# EAGLE board DP6037_PTH.v1 (EAGLE 5.07)
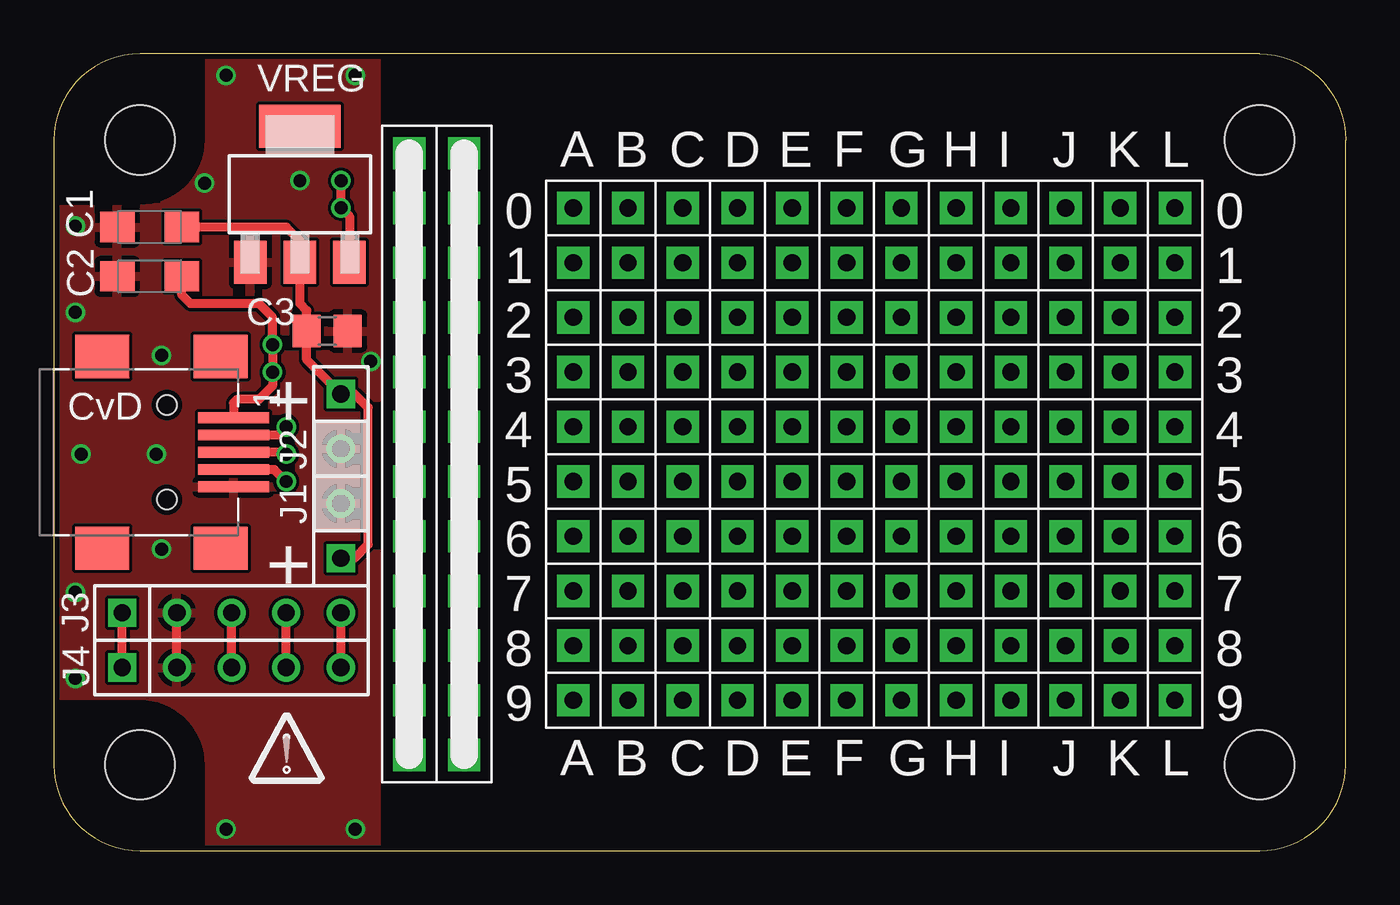
[diagram p0: board, top side]
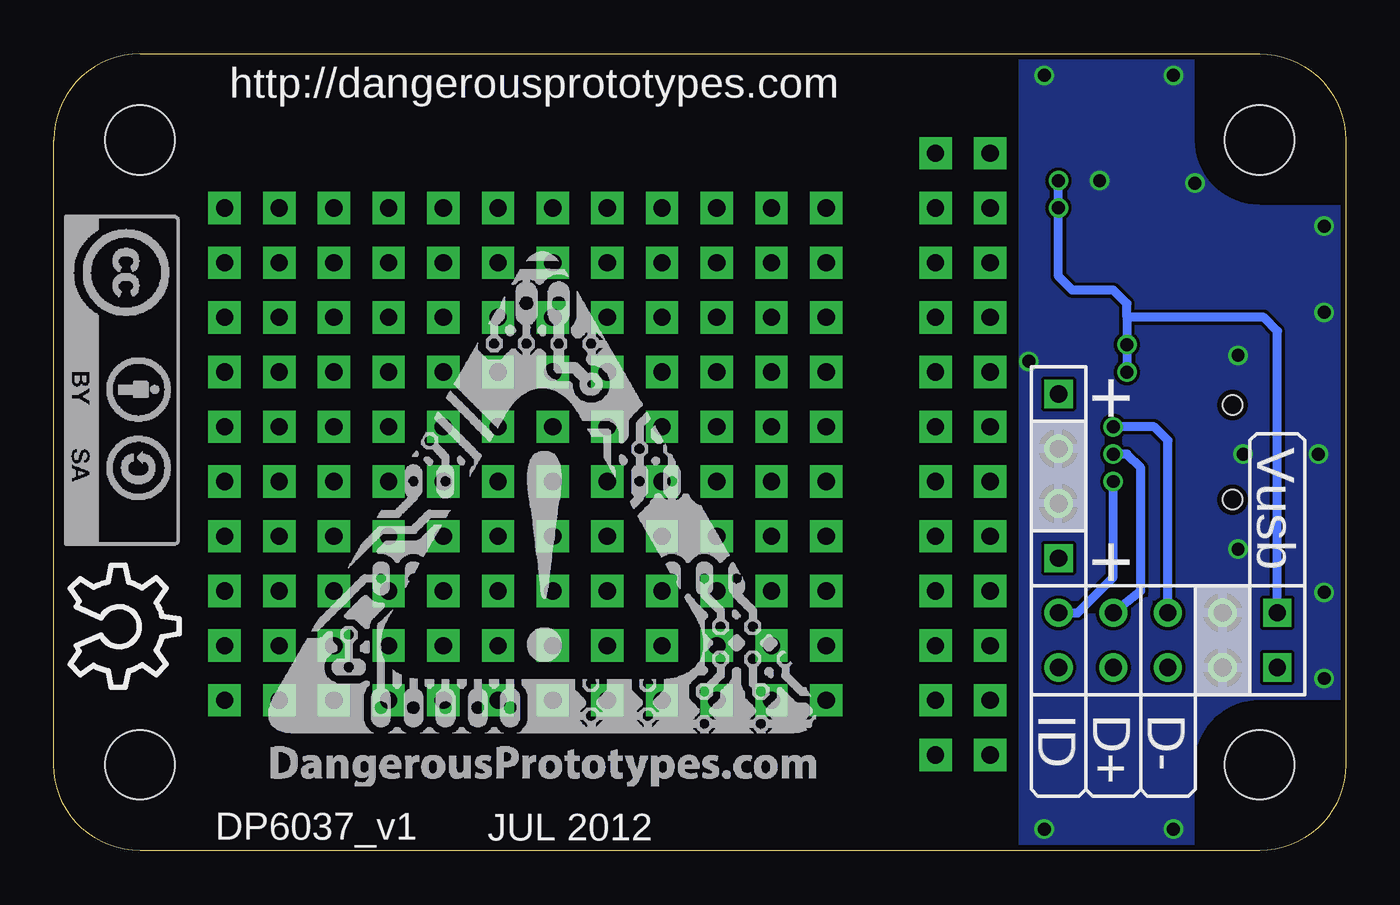
[diagram p1: board, bottom side, seen from below]

Size 60 x 37 mm. Coordinates in mm from the lower left corner, seen from the top.
Copper layers (1*16): Top 0.035mm / dielectric 1.5mm / Bottom 0.035mm
Design rules "Fusion_eagle_rule_v1.1": minimum track width 6mil, minimum drill 12mil, track to track 6mil, track to pad 6mil, pad to pad 6mil, via to via 6mil, smd to smd 0mil, copper to edge 10mil, drill to drill 10mil, minimum pad ring 10mil, minimum via ring 6mil, stop-mask expansion 2mil, vias tented up to drill 100mil, thermal gap 10mil

## Footprints (pad centres in the part's own frame; a part is rotated, then mirrored left to right if it is on the bottom)
SMC_A = smd 1.6 x 1.4: + -1.5,0; - 1.5,0
C805 = smd 1.3 x 1.5: 1 -0.95,0; 2 0.95,0
M1X2 = drill 0.8 square: 1 -1.27,0 | drill 0.8 round: 2 1.27,0
M1X5 = drill 0.8 square: 1 -5.08,0 | drill 0.8 round: 2 -2.54,0; 3 0,0; 4 2.54,0; 5 5.08,0
DP6037_V1 = hole 3.2: 4,4; 56,4; 56,33; 4,33
PROTO_10_12 = drill 0.8 pad 1.5 square: 1 -13.97,-11.43; 2 -11.43,-11.43; 3 -8.89,-11.43; 4 -6.35,-11.43; 5 -3.81,-11.43; 6 -1.27,-11.43; 7 1.27,-11.43; 8 3.81,-11.43; 9 6.35,-11.43; 10 8.89,-11.43; 11 11.43,-11.43; 12 13.97,-11.43; 13 -13.97,-8.89; 14 -11.43,-8.89; 15 -8.89,-8.89; 16 -6.35,-8.89; 17 -3.81,-8.89; 18 -1.27,-8.89; 19 1.27,-8.89; 20 3.81,-8.89; 21 6.35,-8.89; 22 8.89,-8.89; 23 11.43,-8.89; 24 13.97,-8.89; 25 -13.97,-6.35; 26 -11.43,-6.35; 27 -8.89,-6.35; 28 -6.35,-6.35; 29 -3.81,-6.35; 30 -1.27,-6.35; 31 1.27,-6.35; 32 3.81,-6.35; 33 6.35,-6.35; 34 8.89,-6.35; 35 11.43,-6.35; 36 13.97,-6.35; 37 -13.97,-3.81; 38 -11.43,-3.81; 39 -8.89,-3.81; 40 -6.35,-3.81; 41 -3.81,-3.81; 42 -1.27,-3.81; 43 1.27,-3.81; 44 3.81,-3.81; 45 6.35,-3.81; 46 8.89,-3.81; 47 11.43,-3.81; 48 13.97,-3.81; 49 -13.97,-1.27; 50 -11.43,-1.27; 51 -8.89,-1.27; 52 -6.35,-1.27; 53 -3.81,-1.27; 54 -1.27,-1.27; 55 1.27,-1.27; 56 3.81,-1.27; 57 6.35,-1.27; 58 8.89,-1.27; 59 11.43,-1.27; 60 13.97,-1.27; 61 -13.97,1.27; 62 -11.43,1.27; 63 -8.89,1.27; 64 -6.35,1.27; 65 -3.81,1.27; 66 -1.27,1.27; 67 1.27,1.27; 68 3.81,1.27; 69 6.35,1.27; 70 8.89,1.27; 71 11.43,1.27; 72 13.97,1.27; 73 -13.97,3.81; 74 -11.43,3.81; 75 -8.89,3.81; 76 -6.35,3.81; 77 -3.81,3.81; 78 -1.27,3.81; 79 1.27,3.81; 80 3.81,3.81; 81 6.35,3.81; 82 8.89,3.81; 83 11.43,3.81; 84 13.97,3.81; 85 -13.97,6.35; 86 -11.43,6.35; 87 -8.89,6.35; 88 -6.35,6.35; 89 -3.81,6.35; 90 -1.27,6.35; 91 1.27,6.35; 92 3.81,6.35; 93 6.35,6.35; 94 8.89,6.35; 95 11.43,6.35; 96 13.97,6.35; 97 -13.97,8.89; 98 -11.43,8.89; 99 -8.89,8.89; 100 -6.35,8.89; 101 -3.81,8.89; 102 -1.27,8.89; 103 1.27,8.89; 104 3.81,8.89; 105 6.35,8.89; 106 8.89,8.89; 107 11.43,8.89; 108 13.97,8.89; 109 -13.97,11.43; 110 -11.43,11.43; 111 -8.89,11.43; 112 -6.35,11.43; 113 -3.81,11.43; 114 -1.27,11.43; 115 1.27,11.43; 116 3.81,11.43; 117 6.35,11.43; 118 8.89,11.43; 119 11.43,11.43; 120 13.97,11.43
SUPPL_12 = drill 0.8 pad 1.5 square: G40 -13.97,1.27; G41 -11.43,1.27; G42 -8.89,1.27; G43 -6.35,1.27; G44 -3.81,1.27; G45 -1.27,1.27; G46 1.27,1.27; G47 3.81,1.27; G48 6.35,1.27; G49 8.89,1.27; G410 11.43,1.27; G411 13.97,1.27; V40 -13.97,-1.27; V41 -11.43,-1.27; V42 -8.89,-1.27; V43 -6.35,-1.27; V44 -3.81,-1.27; V45 -1.27,-1.27; V46 1.27,-1.27; V47 3.81,-1.27; V48 6.35,-1.27; V49 8.89,-1.27; V410 11.43,-1.27; V411 13.97,-1.27
CONN_USB_MINI-B = smd 2 x 2.5: BODY@1 -4.45,2.5; BODY@2 4.45,2.5; BODY@3 4.45,-3; BODY@4 -4.45,-3 | smd 0.5 x 3.3: D+ 0,3.1; D- -0.8,3.1; GND 1.6,3.1; ID 0.8,3.1; VUSB -1.6,3.1 | hole 0.9: -2.2,0; 2.2,0
SOT-223 = smd 1.5 x 2: 1 -2.3,-3.15; 2 0,-3.15; 3 2.3,-3.15 | smd 3.8 x 2: 4 0,3.15

## Placement (x,y rotation side)
C1  [SMC_A]  4.45,28.96 180 top
C2  [SMC_A]  4.45,26.67 180 top
C3  [C805]  12.7,24.13 0 top
J1  CON_HEADER_1X02-PTH  [M1X2]  13.34,14.86 90 top
J2  CON_HEADER_1X02-PTH  [M1X2]  13.34,19.93 270 top
J3  CON_HEADER_1X05-PTH  [M1X5]  8.26,11.04 0 top
J4  CON_HEADER_1X05-PTH  [M1X5]  8.26,8.51 0 top
PCB1  PCB_DP_RECTANGLE-3.7X6  [DP6037_V1]  0,0 0 top
U$1  FRAME_DINA4_L  [DP_LOGO]  10.81,3.76 0 top
U$3  PROTO_10X12NOSUPPLY  [PROTO_10_12]  38.1,18.41 0 top
U$4  SUPPLY_12  [SUPPL_12]  17.78,18.41 90 top
U$5  [OSHW_10X200_NOTEXT]  59.25,13.25 270 bottom
U$6  [CC-BY-SA]  59.5,29.5 270 bottom
U$7  [DP_LOGO_ART_1X1]  50,3 0 bottom
USB1  CON-USB-F-MINI-B  [CONN_USB_MINI-B]  5.25,18.5 270 top
VREG  [SOT-223]  11.43,30.48 0 top

## Library data of the parts
C1-C3 J1-J4 PCB1 U$6 U$7 USB1 VREG = dp_devices
U$1 = dp_devices; LICENSE: CC-BY-SA; URL1: http://; URL2: DangerousPrototypes.com
U$3 U$4 = DP_protoboard
U$5 = ohw-logo

## Nets
N$2: C1.+ C3.1 J1.1 J2.1 VREG.2
N$3: C1.- C2.- C3.2 J1.2 J2.2 J3.2 J4.2 USB1.GND VREG.1
N$4: C2.+ J3.1 J4.1 USB1.VUSB VREG.3
N$11: J3.3 J4.3 USB1.D-
N$14: J3.4 J4.4 USB1.D+
N$16: J3.5 J4.5 USB1.ID

## Tracks (layer width: path | path; a pad name or v marks a point on that pad's centre or on a via)
N$2
  Top 0.406: J1.1 13.97,13.59 14.61,14.22 14.61,20.57 13.97,21.2 J2.1 11.75,22.79 C3.1 11.75,25.08 11.43,25.4 VREG.2 11.43,28.32 10.79,28.96 C1.+
N$3  (via drill 0.6)
  Top 0.406: J4.2 J3.2
  other vias: 14,1 8,1 1,8 1,12 5,14 5,23 1.27,18.41 1,25 1,29 14,36 8,36 7,31 11.43,31.11 14.72,22.73 4.76,18.41
  pour Top: 15,37 0,37 0,0 15,0
  pour Bottom: 15,0 0,0 0,37 15,37
N$4  (via drill 0.6)
  Top 0.406: J4.1 J3.1 | USB1.VUSB 8.35,20.8 8.51,20.95 9.53,20.95 10.16,21.59 v10.16,22.23 v10.16,23.5 10.16,24.77 9.53,25.4 6.35,25.4 5.95,25.8 C2.+ | v13.34,31.11 v13.34,29.84 13.73,29.45 VREG.3
  Bottom 0.406: v10.16,22.23 v10.16,23.5 10.16,24.77 | 10.16,24.77 10.16,25.4 10.79,26.04 12.7,26.04 13.34,26.67 v13.34,29.84 v13.34,31.11 | J3.1 3.17,24.13 3.81,24.77 10.16,24.77
N$11  (via drill 0.6)
  Top 0.406: J4.3 J3.3 | USB1.D- 10.41,19.3 v10.79,19.68
  Bottom 0.406: J3.3 8.26,19.05 8.89,19.68 v10.79,19.68
N$14  (via drill 0.6)
  Top 0.406: J4.4 J3.4 | USB1.D+ 10.71,18.5 v10.79,18.41
  Bottom 0.406: J3.4 9.53,12.06 9.53,17.78 10.16,18.41 v10.79,18.41
N$16  (via drill 0.6)
  Top 0.406: J4.5 J3.5 | USB1.ID 10.24,17.7 v10.79,17.14
  Bottom 0.406: v10.79,17.14 10.79,12.7 12.45,11.04 J3.5

## Text on the board
tPlace: CvD | + | +
bPlace: http://dangerousprototypes.com | + | Vusb | + | D- | D+ | ID | JUL 2012